# Altium PCB PCB2.PcbDoc
Units mm, origin at the board's own origin, x right, y up, seen from the top; angles counter-clockwise.
Board outline 18.03 x 21.46 mm, 2 copper layers (Top Layer, Bottom Layer); 15 components, 12 nets, 62 pads, 4 vias.
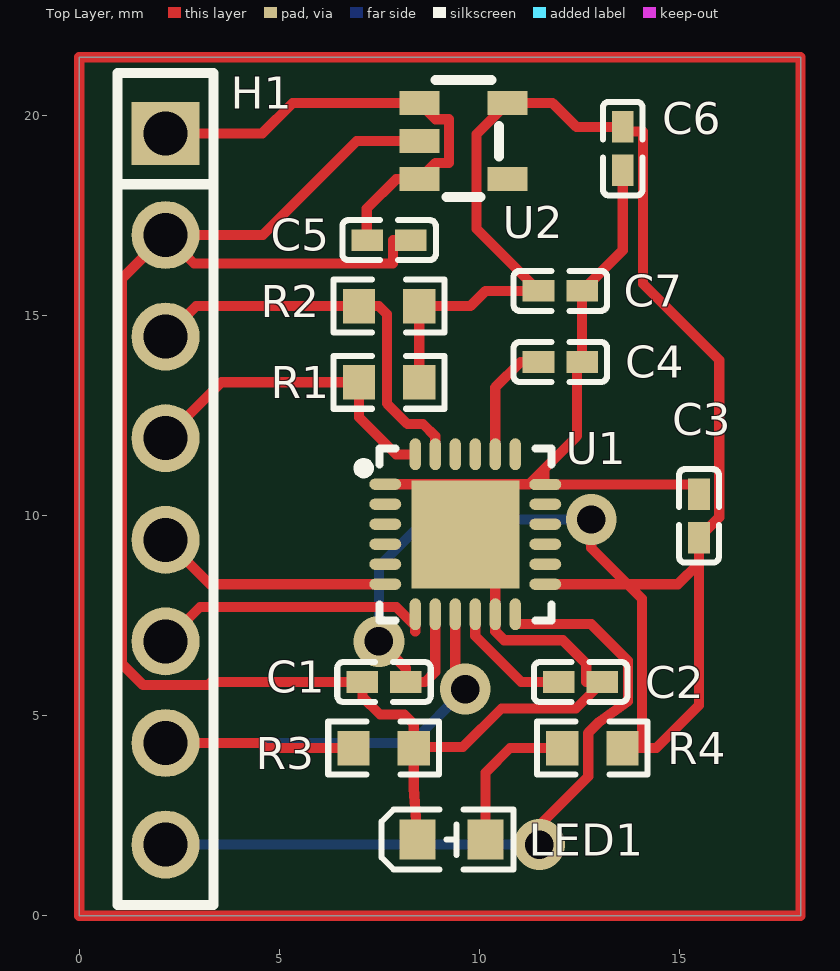
[diagram p0: Top Layer view]
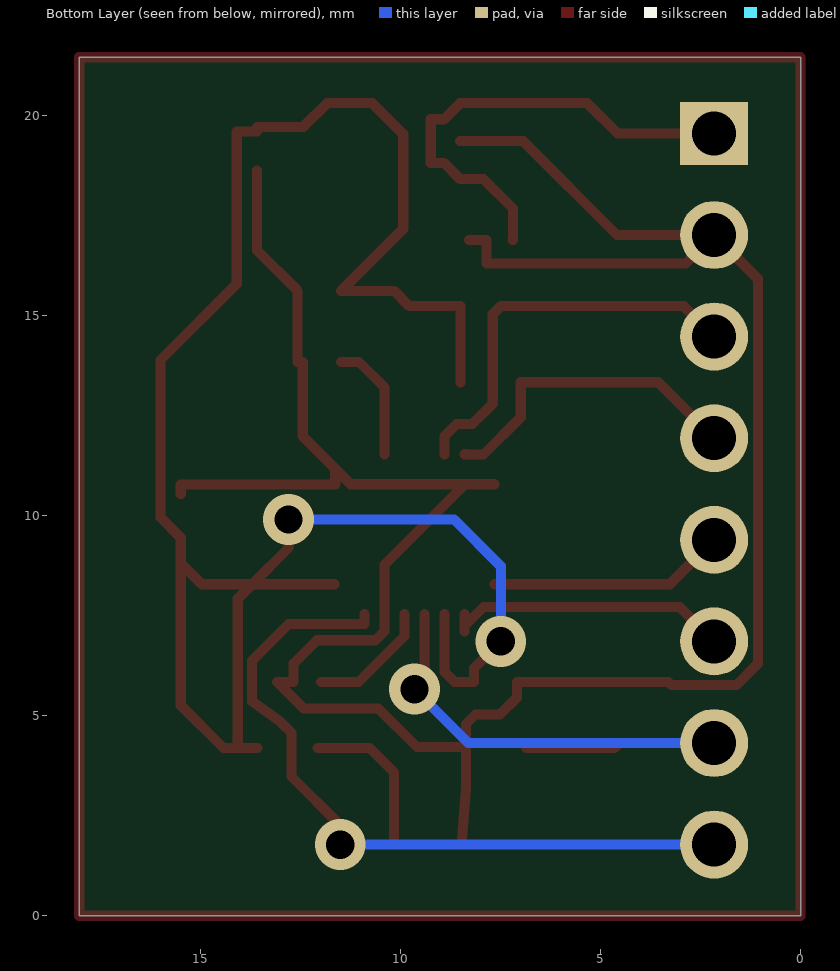
[diagram p1: Bottom Layer view, seen from below]
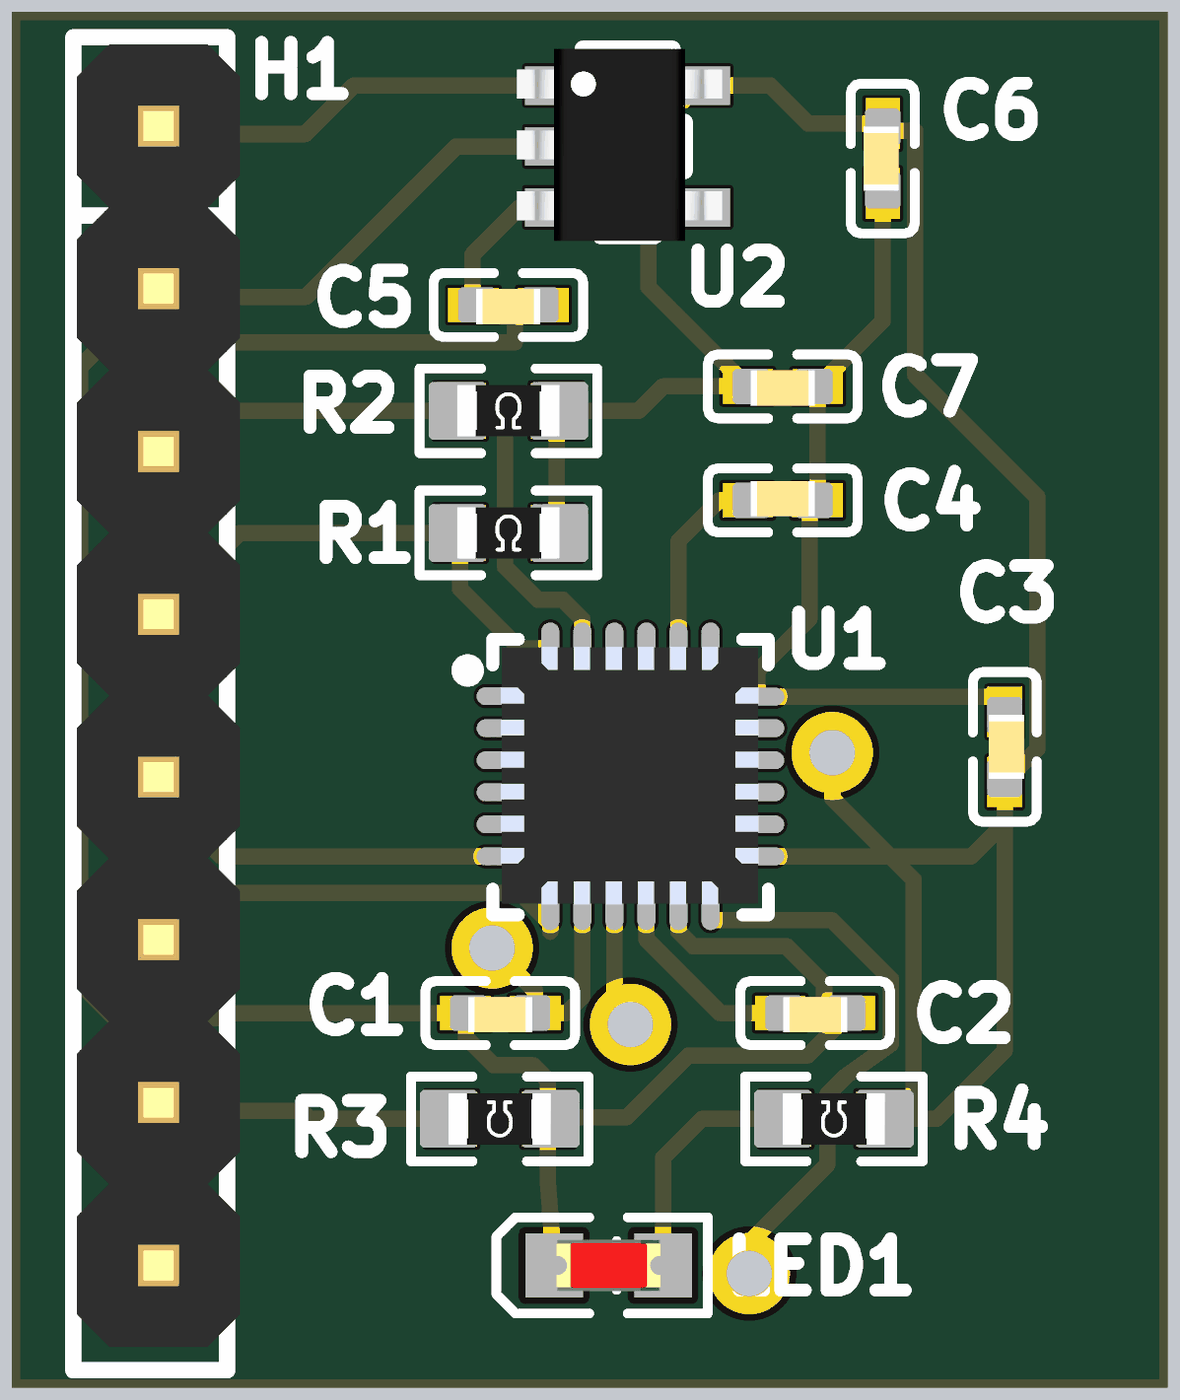
[diagram p2: 3D render of the assembled board from above, using the file's embedded part models]

## Layer stack, top to bottom
Top Solder: solder mask 0.0102, Solder Resist, Dk 3.5
Top Layer: signal copper 0.0356
Dielectric 1: dielectric 0.32, FR-4, Dk 4.8
Bottom Layer: signal copper 0.0356
Bottom Solder: solder mask 0.0102, Solder Resist, Dk 3.5

## Board outline
0,0 0,21.463 18.034,21.463 18.034,0

## Design rules (kind name [scope] priority, off if disabled: settings)
Clearance Clearance_1 [All] p1: gap=0.1 ignorepadtopadclearanceinfootprint=FALSE
Clearance [All] p2: gap=0.254 ignorepadtopadclearanceinfootprint=FALSE
PolygonConnect [All] p1: connectstyle=Relief reliefconductorwidth=0.254 reliefentries=4 polygonreliefangle="90 Angle" airgapwidth=0.254
RoutingVias [All] p1: holewidth=0.711 width=1.27 viastyle="Through Hole" minholewidth=0.711 minwidth=1.27 maxholewidth=0.711 maxwidth=1.27
SolderMaskExpansion [All] p1: expansion=0.102 istentingtop=FALSE
SupplyNets "Schematic Supply Nets_2" [InNet('+MAX6V')] p1: voltage=0.000
SupplyNets "Schematic Supply Nets_1" [InNet('+3V3')] p2: voltage=0.000
SupplyNets "Schematic Supply Nets" [InNet('GND')] p3: voltage=0.000
Width [All] p1: maxlimit=0.254 minlimit=0.254 preferedwidth=0.254
30 further rules are at their usual default settings.

## Components (designator, comment, footprint, x,y, rotation, side; value= is the part's Value field where it differs from the comment)
C1 "10nF/4v" C0402 7.62,5.842 r180 top value=18pF
C2 "0.1uF/2v/104" C0402 12.536,5.842 r180 top value=18pF
C3 "0.1uF/4v/104" C0402 15.494,9.996 r270 top value=18pF
C4 "2.2nF/50V" C0402 12.028,13.843 r0 top value=18pF
C5 "4.7uF" C0402 7.747,16.891 r180 top value=18pF
C6 "10uF" C0402 13.589,19.177 r90 top value=18pF
C7 "0.1uF" C0402 12.028,15.621 r180 top value=18pF
H1 "PM2.54-1*8" HDR-TH_8P-P2.54-V-F 2.159,10.668 r270 top
LED1 "LED0603R" LED0603-FD 9.31,1.905 r180 top
R1 "4.7k" R0603 7.747,13.335 r0 top value=10kΩ
R2 "4.7k" R0603 7.747,15.24 r0 top value=10kΩ
R3 "4.7k" R0603 7.611,4.191 r180 top value=10kΩ
R4 "2k" R0603 12.827,4.191 r180 top value=10kΩ
U1 "MPU-6050_C24112" QFN-24_L4.0-W4.0-P0.50-BL-EP2.7 9.652,9.537 r270 top
U2 "HX9193-33GB-N" SOT-23-5_L2.9-W1.6-P0.95-LS2.8-BL 9.609,19.365 r270 top

## Footprints (in the part's own frame and the unit in brackets; to place one, negate y for a bottom-side part, rotate by r counter-clockwise, add the part's x,y. Pads: shape width x height; smd on the part's side, far side on the other; paste and mask are expansions set on the pad)
C0402 [mm]
  rect 0.79x0.54 smd paste-100 mask+0.051: 1(-0.545,0) 2(0.545,0)
  silkscreen extent -1.17,-0.5 1.17,0.5, body extent -0.5,-0.25 0.5,0.3, height 0.25
HDR-TH_8P-P2.54-V-F [mm]
  rect 1.575x1.7 hole 1.1: 1(-8.89,0)
  round 1.7 hole 1.1: 2(-6.35,0) 3(-3.81,0) 4(-1.27,0) 5(1.27,0) 6(3.81,0) 7(6.35,0) 8(8.89,0)
  silkscreen extent -10.4,-1.2 10.4,1.2, body extent -10.29,-1.14 10.03,1.4, height 8.54
LED0603-FD [mm]
  rect 0.9x1 smd: 1(-0.85,0) 2(0.85,0)
  silkscreen extent -1.55,-0.75 1.75,0.75, body extent -0.81,-0.4 0.81,0.4, height 0.6
QFN-24_L4.0-W4.0-P0.50-BL-EP2.7 [mm]
  oval 0.28x0.8 smd paste-100 mask+0.05: 1(-1.25,-2) 2(-0.75,-2) 3(-0.25,-2) 4(0.25,-2) 5(0.75,-2) 6(1.25,-2) 13(1.25,2) 14(0.75,2) 15(0.25,2) 16(-0.25,2) 17(-0.75,2) 18(-1.242,2)
  oval 0.8x0.28 smd paste-100 mask+0.05: 7(2,-1.25) 8(2,-0.75) 9(2,-0.25) 10(2,0.25) 11(2,0.75) 12(2,1.25) 19(-2,1.25) 20(-2,0.75) 21(-2,0.25) 22(-2,-0.25) 23(-2,-0.75) 24(-2,-1.25)
  rect 2.7x2.7 smd paste-100 mask+0.05: 25(0.012,0)
  silkscreen extent -2.14,-2.79 2.16,2.15, body extent -2.02,-2.02 2,2, height 0.9
R0603 [mm]
  rect 0.806x0.864 smd paste-100 mask+0.051: 1(-0.753,0) 2(0.753,0)
  silkscreen extent -1.39,-0.66 1.39,0.66, body extent -0.8,-0.4 0.8,0.4, height 0.47
SOT-23-5_L2.9-W1.6-P0.95-LS2.8-BL [mm]
  rect 0.6x1 smd paste+0 mask+0.05: 1(-0.95,-1.1) 2(0,-1.1) 3(0.95,-1.1) 4(0.95,1.1) 5(-0.95,1.1)
  silkscreen extent -1.52,-0.7 1.4,0.89, body extent -1.52,-1.73 1.48,1.48, height 0.92

## Part data
C1 C2 C3 C4 C5 C6 C7: library part GRM1555C1H180JA01D, JLCPCB Part Class="Extended Part", LCSC Part Name="18pF ±5% 50V", Manufacturer=muRata(村田), Tolerance=±5%, Add into BOM=yes, Convert to PCB=yes, Datasheet=https://atta.szlcsc.com/upload/public/pdf/source/20161108/1478586362936.pdf, Device=GRM1555C1H180JA01D, Manufacturer Part=GRM1555C1H180JA01D, Supplier=LCSC, Supplier Footprint=0402, Supplier Part=C33149, Symbol=GRM1555C1H180JA01D
H1: Current Rating (Max)=2.5A, JLCPCB Part Class="Extended Part", LCSC Part Name="间距:2.54mm 1x8P 直插", Manufacturer=ZHOURI(洲日), Operating Temperature Range=-40℃~+105℃, Add into BOM=yes, Circular Hole / Square Hole=方孔, Convert to PCB=yes, Datasheet=https://atta.szlcsc.com/upload/public/pdf/source/20221031/E5BAE727A502DC7C69CE947E807E2296.pdf, Device=PM2.54-1*8, Holes Direction=Top, Holes Structure=1x8P, Insulation Height=8.5mm, Manufacturer Part=PM2.54-1*8, Mounting Type=Straight, Number of Holes=8P, Number of Rows=Plugin, Pitch=2.54mm, Row Spacing=2.54mm, Supplier=LCSC, Supplier Footprint=插件,P=2.54mm, Supplier Part=C5224027, Symbol=PM2.54-1*8
LED1: library part YLED0603R, Color Temperature=-, Emitted Color=Red, Forward Current=25mA, Forward Voltage (VF)=1.8V~2.4V, JLCPCB Part Class="Extended Part", Manufacturer=YONGYUTAI(永裕泰), Operating Temperature=-40℃~+85℃, Add into BOM=yes, Convert to PCB=yes, Datasheet=https://atta.szlcsc.com/upload/public/pdf/source/20231027/FB19AF06E2C70028E58AB5CEDD1BDC72.pdf, Device=YLED0603R, Diode Configuration=-, Dominant Wavelength=620nm~625nm, LCSC Part Name=YLED0603R, Lens Color=-, Luminous Intensity=-, Manufacturer Part=YLED0603R, Mounting Sytle=-, Peak Wavelength=-, Power Dissipation=-, Supplier=LCSC, Supplier Footprint=0603, Supplier Part=C19171390, Symbol=YLED0603R, Viewing Angle=-
R1 R2 R3 R4: library part RC0603FR-0710KL, JLCPCB Part Class="Extended Part", LCSC Part Name="厚膜电阻 10kΩ ±1% 100mW", Manufacturer=YAGEO(国巨), Operating Temperature Range=-55℃~+155℃, Temperature Coefficient=±100ppm/℃, Tolerance=±1%, Add into BOM=yes, Convert to PCB=yes, Datasheet=https://atta.szlcsc.com/upload/public/pdf/source/20180927/C295883_E8D83085EA81BD7DE0B2B681138C15EE.pdf, Device=RC0603FR-0710KL, Manufacturer Part=RC0603FR-0710KL, Supplier=LCSC, Supplier Footprint=0603, Supplier Part=C98220, Symbol=RC0603FR-0710KL, Type="Thick Film Resistors"
U1: library part MPU-6050, JLCPCB Part Class="Extended Part", Manufacturer="TDK InvenSense(应美盛)", Operating Temperature=-40℃~+85℃, Add into BOM=yes, Convert to PCB=yes, Datasheet=https://atta.szlcsc.com/upload/public/pdf/source/20140425/1457707046159.pdf, Device=MPU-6050, LCSC Part Name=MPU-6050, Manufacturer Part=MPU-6050, Sensor Type=加速度计陀螺仪, Supplier=LCSC, Supplier Footprint=QFN-24-EP(4x4), Supplier Part=C24112, Symbol=MPU-6050_C24112
U2: JLCPCB Part Class="Extended Part", Manufacturer=HX(恒佳兴), Operating Temperature=-, Output Current=300mA, Output Voltage=3.3V, Add into BOM=yes, Convert to PCB=yes, Datasheet=https://atta.szlcsc.com/upload/public/pdf/source/20220412/18D9B33FD58646224E88440BBF52FED7.pdf, Device=HX9193-33GB-N, Features="Low ESR；Overcurrent Protection(OCP)；With ability", LCSC Part Name=HX9193-33GB-N, Manufacturer Part=HX9193-33GB-N, Noise=-, Number of Outputs=-, Output Configuration=-, Output Type=-, Power Supply Rejection Ratio (PSRR)=-, standby current=-, Supplier=LCSC, Supplier Footprint=SOT-23-5, Supplier Part=C2995655, Symbol=HX9193-33GB-N, Voltage - Supply=-, Voltage Dropout=-

## Via types
v1: diameter 1.27, hole 0.711, Top Layer to Bottom Layer, 4 vias

## Nets (pads, with @x,y where several pads share a name; then routed paths per layer and width w, separated by ;. In a path a pad name is that pad's centre, name@x,y a point inside that pad or via, vN(x,y) a via of type N, cw(c..) or ccw(c..) an arc to the next point about the centre after c; other vN are vias at no path point)
+3V3: C1.1 C3.2 C6.2 C7.2 R1.2 R2.2 R4.1 U1.8 U1.13 U2.5 | length 53.7
  Top Layer w0.254: v1(7.493,6.858) 8.165,6.186 C1.1 8.648,5.842 8.902,6.096 U1.8 ; R1.2 R2.2 9.779,15.24 10.16,15.621 C7.2 9.931,17.172 9.931,19.537 U2.5 11.836,20.315 12.429,19.722 C6.2 13.589,19.609 14.097,19.609 14.097,15.799 16.002,13.894 16.002,9.959 C3.2 15.494,8.814 ; U1.13 13.709,8.288 ; v1(12.802,9.906) 12.802,9.195 13.709,8.288 ; R4.1 14.072,4.191 ; 13.709,8.288 14.968,8.288 15.494,8.814 ; 13.709,8.288 14.072,7.925 14.072,4.191 ; 14.072,4.191 14.427,4.191 15.494,5.258 15.494,8.814
  Bottom Layer w0.254: v1(7.493,6.858) 7.493,8.738 8.661,9.906 v1(12.802,9.906)
+MAX6V: C5.2 H1.1 U2.1 U2.3 | length 12
  Top Layer w0.254: H1.1 4.577,19.558 5.334,20.315 U2.1 8.91,19.914 9.246,19.914 9.246,18.821 8.915,18.821 U2.3 7.925,18.415 7.188,17.678 7.188,16.891 C5.2
GND: C1.2 C2.1 C3.1 C4.2 C5.1 C6.1 C7.1 H1.2 LED1.2 R3.1 U1.1 U1.11 U1.18 U1.25 U2.2 | length 67
  Top Layer w0.254: U1.1 U1.25@8.39,10.787 ; C5.1 7.849,16.891 7.849,16.307 2.87,16.307 H1.2 ; LED1.2 8.365,3.188 R3.1 R3.1@8.365,4.216 ; U2.2 6.934,19.365 4.587,17.018 H1.2 ; C6.1 13.589,16.637 C7.1 C4.2 12.446,13.843 12.446,11.989 11.633,11.176 ; C3.1 15.494,10.78 U1.18 11.633,10.78 11.633,11.176 ; H1.2 1.067,15.926 1.067,6.299 1.6,5.766 3.226,5.766 3.302,5.842 C1.2 7.087,5.842 7.087,5.461 7.518,5.029 8.128,5.029 8.365,4.792 R3.1@8.365,4.216 ; R3.1@8.365,4.216 9.591,4.216 10.556,5.182 12.421,5.182 C2.1 12.675,5.842 12.675,6.299 12.088,6.886 10.628,6.886 10.402,7.112 U1.11 10.402,8.775 U1.25 U1.25@8.39,10.787 ; U1.25@8.39,10.787 11.245,10.787 11.633,11.176
NetC2_2: C2.2 U1.10 | length 3.1
  Top Layer w0.254: U1.10 9.902,6.993 11.053,5.842 C2.2
NetC4_1: C4.1 U1.20 | length 3
  Top Layer w0.254: U1.20 10.402,13.208 11.037,13.843 C4.1
NetH1_3: H1.3 R2.1 U1.23 | length 10.2
  Top Layer w0.254: H1.3 2.921,15.24 R2.1 7.493,15.24 7.696,15.037 7.696,12.802 8.204,12.294 8.597,12.294 8.902,11.989 U1.23
NetH1_4: H1.4 R1.1 U1.24 | length 8.1
  Top Layer w0.254: H1.4 3.556,13.335 R1.1 6.994,12.463 7.925,11.532 8.402,11.532 U1.24
NetH1_5: H1.5 U1.6 | length 6
  Top Layer w0.254: H1.5 3.269,8.288 U1.6
NetH1_6: H1.6 U1.7 | length 7.2
  Top Layer w0.254: H1.6 3.021,7.72 7.925,7.72 U1.7@8.402,7.243 ; 8.402,7.112 U1.7@8.402,7.243 ; U1.7 U1.7@8.402,7.243
NetH1_7: H1.7 R3.2 U1.9 | length 14.8
  Top Layer w0.254: H1.7 4.521,4.318 4.648,4.191 R3.2 ; U1.9 9.402,5.914 v1(9.652,5.664)
  Bottom Layer w0.254: H1.7 8.306,4.318 v1(9.652,5.664)
NetH1_8: H1.8 U1.12 | length 18.4
  Top Layer w0.254: U1.12 10.902,7.29 12.802,7.29 13.716,6.375 13.716,5.359 13.005,4.851 12.725,4.572 12.725,3.48 11.506,2.261 v1(11.506,1.778)
  Bottom Layer w0.254: H1.8 v1(11.506,1.778)
NetLED1_1: LED1.1 R4.2 | length 3.8
  Top Layer w0.254: LED1.1 10.16,3.581 10.77,4.191 R4.2
pads on no net: U1.2 U1.3 U1.4 U1.5 U1.14 U1.15 U1.16 U1.17 U1.19 U1.21 U1.22 U2.4
copper on no net: | length 79
  Top Layer w0.254: 0,0 0,21.463 18.034,21.463 18.034,0 0,0